# Altium PCB AT_START_F426 V1.0.pcbdoc (part 2 of 3)
Units mil, origin at the board's own origin, x right, y up, seen from the top; angles counter-clockwise.
Board outline 4602.43 x 3597.64 mil, 2 copper layers (Top Layer, Bottom Layer); 123 components, 105 nets, 472 pads, 880 vias.
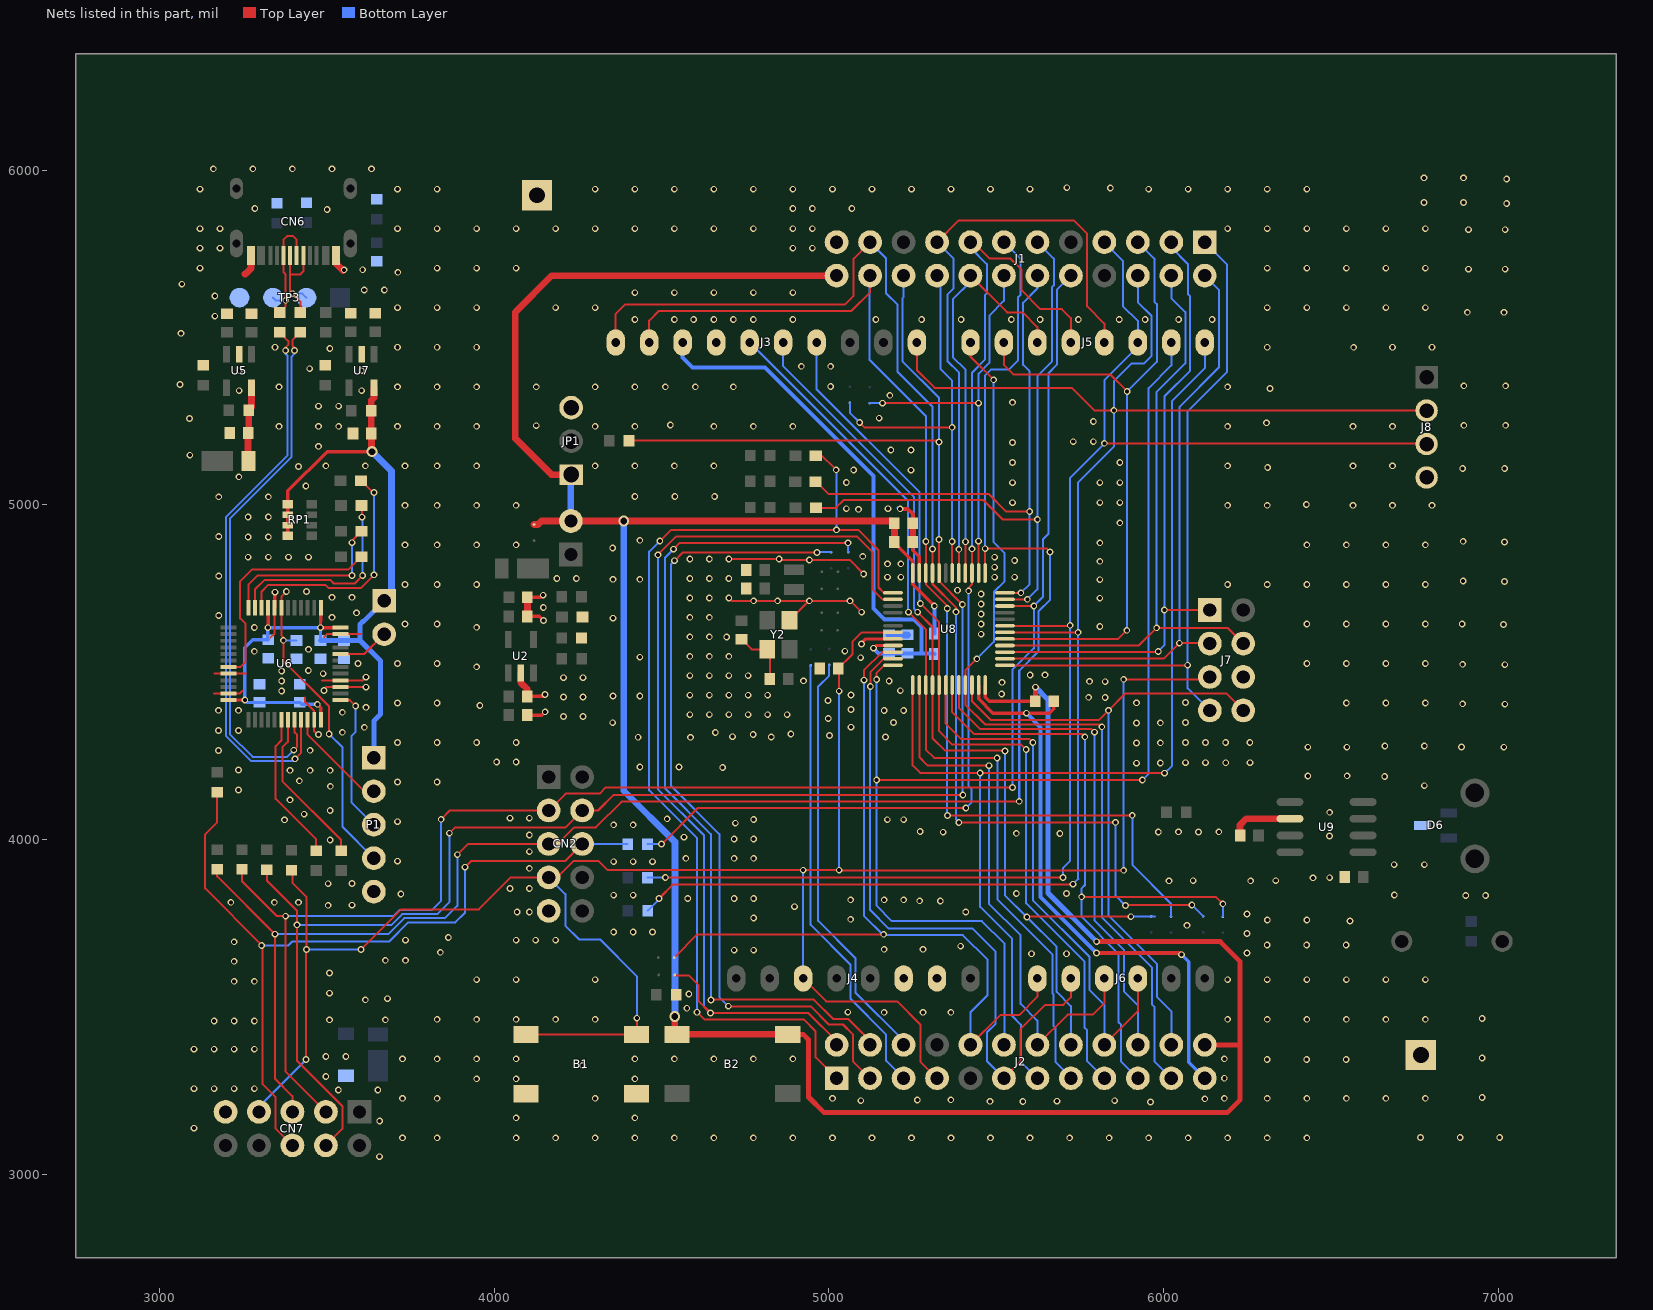
[diagram p2: the nets of this part, all layers, seen from the top]

## Via types
v1: diameter 20, hole 12, Top Layer to Bottom Layer, 848 vias
v2: diameter 32, hole 20, Top Layer to Bottom Layer, 21 vias
v3: diameter 19.68, hole 11.81, Top Layer to Bottom Layer, 11 vias

## Nets (pads, with @x,y where several pads share a name; then routed paths per layer and width w, separated by ;. In a path a pad name is that pad's centre, name@x,y a point inside that pad or via, vN(x,y) a via of type N, cw(c..) or ccw(c..) an arc to the next point about the centre after c; other vN are vias at no path point) (continued)
GND: B1.3 B1.4 C1.1 C2.1 C3.1 C4.1 C5.1 C6.1 C7.1 C8.1 C9.1 C10.1 C11.1 C12.1 C13.1 C14.1 C15.1 C16.1 C17.1 C18.1 C19.1 C20.1 C21.1 C22.1 C23.2 C24.2 C25.2 C26.2 C27.1 C28.1 C29.1 CN2.9 CN6.A1B12 CN6.B1A12 CN7.9 D4.2 D6.3 J1.23 J2.23 J3.7 J4.6 J4.7 J7.6 J8.4 JP1.3 LED1.2 P1.5 R2.2 R20.2 R34.2 R35.2 R36.2 R49.2 R51.2 T1.1 T2.1 TP3.4 U2.2 U5.2 U6.8 U6.20 U6.23 U6.35 U6.39 U6.40 U6.47 U7.2 U8.8 U8.23 U8.47 U9.2 Y2.2 Y2.4 | length 4746.7
  Top Layer w6: 3162.33,4436.4 U6.23@3206.5,4436.4 3240.42,4436.4 3248.06,4444.03 ; 3163.9,4495.45 U6.20@3206.5,4495.45 3258.71,4495.45 ; 3331.58,4602.93 3344.29,4615.64 U6.8@3344.29,4692.3 ; 3434.88,4424.47 3434.88,4411.58 3462.4,4384.06 U6.35@3462.4,4357.66 3462.4,4322.92 v1@3475.43,4309.89 ; 3485.27,4475.77 U6.40@3541.14,4475.77 3607.85,4475.77 v1(3617.17,4485.09) ; 3491.7,4605.07 3500.19,4613.56 U6.47@3541.14,4613.56 3602.28,4613.56 ; 3497.54,4456.08 U6.39@3541.14,4456.08 3616.19,4456.08 v1(3617.17,4455.09) ; v1(4701,4721.84) 4709.8,4713.04 v1(4775.43,4713.04) v1(4847.13,4713.04) v1@4940.65,4713.04 ; v1(4701,4838.06) v1(4851.5,4838.06) 4854.13,4835.43 v1(4941.58,4835.43) 5061.84,4835.43 v1(5103.97,4793.3) ; C3.1@4739.22,4598.2 4768.97,4568.45 Y2.4@4815.76,4568.45 4823.66,4560.55 C4.1@4823.66,4479.76 ; Y2.2@4882.69,4655.07 v1@4940.65,4713.04 ; v1(5097.9,4679.2) 5071.75,4705.35 5071.75,4705.77 5064.48,4713.04 v1@4940.65,4713.04
  Top Layer w10: U6.8@3344.29,4692.3 3344.29,4738.21 v1(3345.17,4739.09) ; C23.2@4098.78,4371.76 4142.56,4371.76 v1(4152.3,4381.5) ; C24.2@4098.78,4427.76 4146.36,4427.76 v1(4151.94,4433.34) ; C25.2@4099.06,4666.93 4134.75,4666.93 v1(4147.32,4654.36) ; C26.2@4099.39,4724.02 4140.1,4724.02 v1(4146.27,4730.19) ; v1(5097.28,4583.96) 5097.28,4585.83 5110.84,4599.38 U8.8@5191.5,4599.38 ; C6.1@5251.16,4888.52 5251.16,4864.67 5270.19,4845.64 U8.47@5270.2,4796.18 ; U8.23@5447.4,4461.58 5447.4,4420.03 5490.02,4377.42 v3(5590.06,4377.42) 5658.75,4377.42 5672.36,4391.03 C7.1@5672.36,4413.06
  Top Layer w12: v1(5213.06,4988.18) 5235.07,4988.18 5251.1,4972.15 C5.1@5251.1,4945.1 ; v1(5799.71,3661.28) 6048.68,3661.28 v1(6053.9,3656.06)
  Top Layer w20: 3255.14,5689.5 3256.72,5689.5 3273.37,5706.16 CN6.B1A12@3273.37,5744.79 ; CN6.A1B12@3527.17,5744.79 3527.17,5721.22 v1@3548.43,5699.96 ; U2.2@4079.24,4497.73 4079.24,4469.74 4098.78,4450.2 C24.2@4098.78,4427.76 ; C25.2@4099.06,4666.93 4099.39,4667.27 C26.2@4099.39,4724.02 ; C6.1@5251.1,4888.58 C5.1@5251.1,4945.1 ; C13.1@6228.62,4012.42 6228.13,4012.91 6228.13,4043.64 6246.64,4062.15 U9.2@6377.82,4062.15
  Bottom Layer w10: v1@5206.51,4991.67 5210.01,4988.18 v1(5213.06,4988.18) ; v1(6053.9,3656.06) 6075.22,3634.74 6075.22,3334.63 J2.23@6123.18,3286.67
  Bottom Layer w12: v3(5590.06,4377.42) 5632.24,4335.25 5632.24,3828.75 v1(5799.71,3661.28)
  Bottom Layer w20: C29.1@5179.22,4611.32 C28.1@5235.22,4611.32
  other v1: 3657.45,3052.34 3726.36,3108.67 3829.52,3108.67 4065.74,3108.67 4183.85,3108.67 4301.96,3108.67 4420.07,3108.67 4538.18,3108.67 4656.29,3108.67 4774.41,3108.67 4892.52,3108.67 5010.63,3108.67 5128.74,3108.67 5246.85,3108.67 5364.96,3108.67 5483.07,3108.67 5601.18,3108.67 5719.29,3108.67 5837.4,3108.67 5955.51,3108.67 6073.62,3108.67 6191.73,3108.67 6309.84,3108.67 6427.95,3108.67 6767.93,3109.56 6886.04,3109.56 7004.15,3109.56 3103.33,3137.54 3657.72,3158.99 4065.74,3168.67 4420.07,3168.67 5961.14,3215.99 5579.37,3217.28 5481.31,3217.99 5681.64,3218.34 5095.49,3219.92 5853.81,3219.98 5264.26,3221.51 5364.25,3222.21 6123.22,3225.22 3726.36,3226.78 3829.52,3226.78 4301.96,3226.78 5010.63,3226.78 6181.73,3226.78 6309.84,3226.78 6427.95,3226.78 6546.06,3226.78 6664.17,3226.78 6782.28,3226.78 6952.19,3229.35 3534.45,3251.78 3652.56,3251.78 3103.33,3255.65 3163.33,3255.65 3223.33,3255.65 3283.33,3255.65 3947.63,3284.89 4065.74,3284.89 4420.07,3284.89 6181.73,3286.78 3496.87,3291.89 4264.59,3324.78 6309.55,3342.82 6427.66,3342.82 6545.77,3342.82 3726.36,3344.89 3829.52,3344.89 3947.63,3344.89 4065.74,3344.89 4420.07,3344.89 4538.18,3344.89 4656.29,3344.89 4774.41,3344.89 4892.52,3344.89 6181.73,3344.89 6952.19,3347.46 3496.87,3351.89 3556.87,3351.89 3103.33,3373.76 3163.33,3373.76 3223.33,3373.76 3283.33,3373.76 3163.33,3458.06 3223.33,3458.06 3283.33,3458.06 3508.04,3461.43 3674.89,3461.11 3829.52,3463 3947.63,3463 4065.74,3463 4183.85,3463 4301.96,3463 6191.73,3463 6309.84,3463 6427.95,3463 6546.06,3463 6664.17,3463 6782.28,3463 6952.19,3465.57 5056.51,3484.22 5165.22,3483.75 5281.44,3483.75 5364.55,3483.75 4575.57,3495.93 3614.89,3521.11 3681.46,3524.63 4581.77,3538.69 3508.04,3541.09 3223.33,3576.17 3283.33,3576.17 3947.63,3581.11 4065.74,3581.11 4301.96,3581.11 6191.73,3581.11 6309.84,3581.11 6427.95,3581.11 6546.06,3581.11 6664.17,3581.11 6782.28,3581.11 3508.04,3601.09 3223.33,3636.17 3674.89,3639.22 3734.89,3639.22 5605.22,3658.76 5710.22,3658.76 6249.36,3661.11 3839.36,3663.01 4717.11,3669.51 4775.22,3669.51 5165.22,3672.06 5281.44,3672.06 5393.67,3681.44 6309.55,3685.15 6427.66,3685.15 6545.77,3685.15 3223.33,3694.28 3734.89,3699.22 4065.74,3699.22 4123.85,3699.22 4183.85,3699.22 3863.04,3707.11 6249.36,3719.22 4357.11,3723.76 4415.22,3723.76 4473.33,3723.76 6070.22,3743.76 6556.88,3756.69 6310.11,3759.86 6428.22,3759.86 5065.07,3761.65 4775.22,3765.65 6249.36,3777.33 4068.69,3783.29 4105.22,3783.76 5409,3783.76 4897.24,3799.51 3503.85,3803.27 3575.22,3803.76 3213.33,3812.39 3343.33,3812.39 3415.2,3812.39 5332.98,3816.24 5271.36,3816.71 5065.07,3819.76 5165.22,3819.76 5223.33,3819.76 4578.37,3823.76 4717.11,3823.76 4775.22,3823.76 6902.93,3832.86 6962.51,3832.86 4357.11,3833.76 4415.22,3833.76 6689.41,3834.4 3721.15,3837.31 5560.22,3838.76 5710.22,3838.76 4047.11,3853.76 4105.22,3853.76 3503.85,3868 3575.22,3868.5 6016.47,3876.76 6088.67,3877.28 6260.42,3876.76 6335.21,3877.28 6446.61,3885.53 6496.13,3886.04 4105.22,3913.76 6688.85,3924.81 6779.11,3924.89 4357.11,3933.76 4415.22,3933.76 4473.33,3933.76 3711.41,3935.44 4572.83,3943.72 4717.11,3943.72 4775.22,3943.72 4105.22,3963.76 3510.16,3998.69 4717.11,4001.83 4775.22,4001.83 4566.97,4006.99 6495.74,4010.6 4105.22,4013.76 5689.92,4018.27 5560.22,4018.76 5341.53,4022.14 5984.54,4022.7 6044.79,4023.14 6104.71,4022.7 6164.96,4023.14 5272.76,4023.86 4357.11,4043.76 4415.22,4043.76 4720.63,4048.92 3711.41,4053.55 3373.58,4058.69 5174.85,4059.24 5223.33,4059.24 4775.22,4059.94 4516.72,4062.02 4047.11,4063.76 4105.22,4063.76 3432.34,4075.89 6496.25,4081.26 3510.16,4086.68 3390.16,4118.69 3236.14,4147.95 3510.32,4158.87 6779.11,4161.11 3711.41,4171.66 3829.52,4171.66 3418.07,4175.29 6660.87,4188.37 6431.04,4189.72 6548.44,4190.43 3390.16,4206.68 3450.16,4206.68 3510.16,4206.68 3236.14,4207.95 4682.82,4215.47 4435.22,4216.99 4552.41,4216.64 5919.46,4228.25 5990.22,4228.76 6185.84,4229.43 6065.4,4229.68 6125.4,4229.68 6258.24,4229.61 4007.63,4231.66 4065.74,4231.66 3176.14,4266.06 3450.16,4266.68 6431.04,4275.85 6547.64,4276.05 7016.59,4275.92 6890.48,4276.69 6661,4279.22 6779.11,4279.22 5919.46,4288.25 5990.22,4288.76 3711.41,4289.77 3829.52,4289.77 3947.63,4289.77 4065.74,4289.77 6065.4,4289.68 6125.4,4289.68 6185.4,4289.68 6257.81,4289.87 4586.54,4305.22 4430.3,4305.63 4827.89,4306.1 5169.44,4306.08 4712.08,4307.16 5002.12,4310.64 3475.22,4313.76 4773.88,4314.02 4886.41,4315.07 3546.49,4320.17 4660.83,4320 3176.14,4326.06 3236.14,4326.06 3612.17,4335.09 5066.03,4335.71 5919.46,4348.25 4354.05,4349.25 5990.22,4348.76 5193.25,4349.71 6065.4,4349.68 4998.2,4361.72 4207.11,4367.54 4265.22,4367.54 4584.78,4373.18 4642.89,4373.18 4701,4373.18 4759.11,4373.18 4817.22,4373.18 4875.33,4373.18 3546.49,4380.17 3176.14,4386.06 3236.14,4386.06 5165.22,4385.65 5223.33,4385.65 5066.22,4388.31 3617.17,4395.09 3957.17,4400.54 6893.65,4405.35 7019.75,4404.58 3711.41,4407.88 3829.52,4407.88 5919.46,4408.25 6546.06,4407.88 6664.17,4407.88 6782.28,4407.88 6065.4,4409.68 4997.68,4415.49 5825.38,4424.36 5776.15,4424.77 4207.11,4425.65 4265.22,4425.65 4355.22,4428.88 4435.22,4428.88 4584.78,4431.29 4642.89,4431.29 4701,4431.29 4759.11,4431.29 4817.22,4431.29 5066.22,4431.98 5516.43,4435.12 3365.22,4443.76 3491.33,4445.2 5213.71,4444.7 5517.12,4469.85 5825.38,4471.55 5778.96,4472.66 3365.22,4473.76 4924.52,4473.99 5180.22,4473.76 4207.11,4483.76 4265.22,4483.76 4584.78,4489.4 4642.89,4489.4 4701,4489.4 4759.11,4489.4 5601.45,4491.86 5645.81,4492.2 3489.18,4495.52 3365.22,4503.76 3444.75,4505.24 3947.63,4515.99 6893.65,4523.46 7019.75,4522.69 3593.3,4525.99 3711.41,4525.99 3829.52,4525.99 6427.95,4525.99 6546.06,4525.99 6664.17,4525.99 6782.28,4525.99 5095.23,4543.42 4435.22,4545.1 4584.78,4547.51 4642.89,4547.51 4701,4547.51 3283.23,4562.14 5047.86,4563.02 3445.42,4568.23 4694.67,4605.39 4584.78,4605.62 4642.89,4605.62 5455.22,4613.76 3283.23,4633.73 3947.63,4634.1 5809.53,4636.37 7015.72,4642.33 3733.37,4644.1 3829.52,4644.1 5455.22,4643.76 6427.95,4644.1 6546.06,4644.1 6664.17,4644.1 6782.28,4644.1 6892.13,4644.07 4355.22,4661.32 3515.22,4663.76 4584.78,4663.73 4642.89,4663.73 3177.11,4669.43 5455.22,4673.76 3588.51,4677.52 4146.71,4693.5 5455.22,4703.76 4941.68,4713.04 5063.02,4713.04 5809.53,4721.37 4584.78,4721.84 4642.89,4721.84 3515.22,4723.76 3575.22,4723.76 5455.22,4733.76 3439.17,4741.09 5384.62,4744.83 3733.37,4762.21 3829.52,4762.21 3947.63,4762.21 6191.73,4762.21 6309.84,4762.21 6427.95,4762.21 6546.06,4762.21 6664.17,4762.21 6782.28,4762.21 7018.88,4771 6895.29,4772.74 5809.53,4776.37 4355.22,4777.54 4435.22,4777.54 4187.4,4780.13 4245.51,4780.13 4584.78,4779.95 4642.89,4779.95 4701,4779.95 5175.22,4783.76 5215.22,4783.76 5495.22,4783.76 5555.22,4783.76 3177.11,4787.54 5495.22,4813.76 5175.22,4823.76 5215.22,4823.76 5809.53,4831.37 5555.22,4833.76 4584.78,4838.06 4642.89,4838.06 3265.22,4843.76 3325.22,4843.76 3385.22,4843.76 3445.22,4843.76 5495.22,4843.76 5101.25,4846.11 4354.05,4871.25 3733.37,4880.32 3829.52,4880.32 3947.63,4880.32 4065.74,4880.32 6427.95,4880.32 6546.06,4880.32 6664.17,4880.32 6782.28,4880.32 5809.53,4886.37 7018.88,4889.11 6895.29,4890.85 4435.22,4893.76 3265.22,4903.76 3325.22,4903.76 3177.11,4905.65 5869.53,4946.37 3265.22,4963.76 3325.22,4963.76 5088.41,4986.67 5176.57,4988.46 5052.38,4988.55 3733.37,4998.44 3829.52,4998.44 3947.63,4998.44 4065.74,4998.44 6191.73,4998.44 6309.84,4998.44 6566.06,4998.44 6684.17,4998.44 6802.28,4998.44 6426.54,5001.01 5548.62,5006.37 5809.53,5006.37 5869.53,5006.37 3177.11,5023.76 3325.22,5023.76 3437.15,5056.55 5548.62,5066.37 5809.53,5066.37 5869.53,5066.37 5052.15,5066.66 3237.11,5083.76 5074.33,5104.19 5245.22,5103.76 6893.87,5108.84 7019.2,5108.84 6310.89,5111.62 3415.19,5114.66 3497.15,5116.55 3615.26,5116.55 3733.37,5116.55 3829.52,5116.55 3947.63,5116.55 4301.96,5116.55 4420.07,5116.55 4538.18,5116.55 4656.29,5116.55 6191.73,5116.55 6566.06,5116.55 6684.17,5116.55 5548.62,5126.37 5869.53,5126.37 3090.78,5148.43 5185.22,5163.76 5245.22,5163.76 3475.19,5174.66 5548.62,5186.37 5730.22,5188.76 5790.22,5188.76 3357.08,5234.66 3475.19,5234.66 3535.19,5234.66 3711.41,5234.66 3829.52,5234.66 3947.63,5234.66 4301.96,5234.66 4420.07,5234.66 4656.29,5234.66 4774.41,5234.66 4892.52,5234.66 6191.73,5234.66 6566.06,5234.66 6684.17,5234.66 4125.74,5236.55 6897.04,5237.51 7022.37,5237.51 4526.22,5238.53 6307.43,5244.86 5790.22,5248.76 3089.6,5257.97 5150.22,5258.76 3475.19,5294.66 3535.19,5294.66 5548.62,5306.37 5182.09,5327.2 3238.17,5340.97 3604.17,5340.97 6318.05,5347.49 3357.08,5352.77 3711.41,5352.77 3829.52,5352.77 3947.63,5352.77 4125.74,5352.77 4301.96,5352.77 4420.07,5352.77 4511.55,5352.77 4601.22,5352.77 4714.41,5352.77 6191.73,5352.77 5005.22,5353.76 6897.04,5355.62 7022.37,5355.62 3061.49,5359.54 3238.17,5400.97 3604.17,5400.97 3448.88,5407.08 4917.72,5413.76 5005.22,5413.76 3508.88,5467.08 3345.29,5470.88 3711.41,5470.88 3829.52,5470.88 3947.63,5470.88 6309.84,5470.88 6567.93,5470.64 6684.17,5470.88 6802.28,5470.88 3064.25,5512.4 4420.07,5553.78 4538.18,5553.78 4596.29,5553.78 4656.29,5553.78 4714.41,5553.78 4774.41,5553.78 4892.52,5553.78 5140.22,5553.76 5277.11,5553.76 5395.22,5553.76 5545.22,5553.76 5631.44,5553.76 5745.22,5553.76 5867.66,5553.76 5945.22,5553.76 6045.22,5553.76 6145.22,5553.76 3165.22,5563.76 6907.79,5575.35 7017.46,5575.35 3711.41,5588.99 3829.52,5588.99 3947.63,5588.99 4183.85,5588.99 4301.96,5588.99 6309.84,5588.99 6427.95,5588.99 6546.06,5588.99 6664.17,5588.99 6782.28,5588.99 3165.22,5623.76 4420.07,5634.09 4538.18,5634.09 4656.29,5634.09 4774.41,5634.09 4892.52,5634.09 3611.85,5642.2 3671.85,5642.2 3066.69,5659.17 3712.35,5694.67 3551.85,5702.2 3606.92,5702.43 6910.96,5704.01 7020.63,5704.01 3120.86,5707.1 3829.52,5707.1 3947.63,5707.1 4065.74,5707.1 6309.84,5707.1 6427.95,5707.1 6546.06,5707.1 6664.17,5707.1 6782.28,5707.1 3120.86,5767.1 3180.86,5767.1 4892.52,5767.1 4950.63,5767.1 6910.96,5822.12 7020.63,5822.12 3120.86,5825.21 3180.86,5825.21 3711.41,5825.21 3829.52,5825.21 3947.63,5825.21 4065.74,5825.21 4183.85,5825.21 4301.96,5825.21 4420.07,5825.21 4538.18,5825.21 4656.29,5825.21 4774.41,5825.21 4892.52,5825.21 4950.63,5825.21 6191.73,5825.21 6309.84,5825.21 6427.95,5825.21 6546.06,5825.21 6664.17,5825.21 6782.28,5825.21 3501.15,5882.6 3284.86,5885.42 4892.52,5885.21 4950.63,5885.21 5068.74,5885.21 7025.12,5900.25 6778.34,5903.42 6896.45,5903.42 3120.86,5943.32 3711.41,5943.32 3829.52,5943.32 4301.96,5943.32 4420.07,5943.32 4538.18,5943.32 4656.29,5943.32 4774.41,5943.32 4892.52,5943.32 5010.63,5943.32 5128.74,5943.32 5246.85,5943.32 5364.96,5943.32 5483.07,5943.32 5601.18,5943.32 5955.51,5943.32 6073.62,5943.32 6191.73,5943.32 6309.84,5943.32 6427.95,5943.32 5841.09,5946.48 5710.84,5947.54 7025.12,5973.75 6778.34,5976.92 6896.45,5976.92 3160.89,6003.76 3279,6003.76 3397.11,6003.76 3515.22,6003.76 3633.33,6003.76
  other v3: 4420.45,5024.82 4539.71,5024.82 4658.61,5024.82
LD1: LD1.2 U6.10 | length 713.3
  Top Layer w6: U6.10@3304.92,4692.3 3304.92,4740.84 3325.17,4761.09 3495.17,4761.09 3505.17,4751.09 3601.17,4751.09 v1(3641.17,4791.09) ; LD1.2@3602.35,5072.3 3637.56,5037.09 v1(3641.17,5037.09)
  Bottom Layer w6: v1(3641.17,4791.09) v1(3641.17,5037.09)
LD2: LD2.2 U6.11 | length 613.2
  Top Layer w6: U6.11@3285.24,4692.3 3285.24,4747.16 3313.17,4775.09 3511.17,4775.09 3521.17,4765.09 3583.17,4765.09 v1(3607.17,4789.09) ; LD2.2@3603.31,4998.21 3605.17,4996.34 v1(3605.17,4963.09)
  Bottom Layer w6: v1(3605.17,4963.09) 3607.17,4961.09 v1(3607.17,4789.09)
LD3: LD3.2 U6.12 | length 534.1
  Top Layer w6: U6.12@3265.55,4692.3 3265.55,4761.47 3293.17,4789.09 v1(3575.17,4789.09) ; v1(3575.17,4887.09) 3575.17,4893.13 LD3.2@3603.35,4921.3
  Bottom Layer w6: v1(3575.17,4789.09) v1(3575.17,4887.09)
LD4: LD4.2 U6.19 | length 696.8
  Top Layer w6: U6.19@3206.5,4515.14 3241.22,4515.14 3257.17,4531.09 3257.17,4645.09 3241.17,4661.09 3241.17,4771.09 3277.17,4807.09 3565.1,4807.09 LD4.2@3603.31,4845.3
M-ATLK_RX: R48.1 U6.31 | length 470.7
  Top Layer w6: U6.31@3383.66,4357.66 3383.66,4291.62 3367.17,4275.13 3367.17,4174.14 3542.35,3998.96 R48.1@3542.35,3966.3
M-ATLK_TX: R47.1 U6.30 | length 448.5
  Top Layer w6: U6.30@3363.98,4357.66 3363.98,4295.93 3347.17,4279.13 3347.17,4121.48 3468.35,4000.3 R47.1@3468.35,3966.3
M-BOOT0: J9.2 U6.44 | length 154.6
  Top Layer w6: U6.44@3541.14,4554.51 3612.55,4554.51 J9.2@3671.35,4613.3
M-NRST: C22.2 P1.4 U6.7 | length 957
  Top Layer w6: v1(3379.17,4741.09) 3363.98,4725.9 U6.7@3363.98,4692.3 3363.98,4610.29 3369.98,4604.29 3369.98,4534.64 3507.17,4397.45 v1(3507.17,4315.09)
  Bottom Layer w6: v1(3369.98,4595.35) 3370.67,4594.65 C22.2@3409.17,4594.65 ; v1(3507.17,4315.09) 3547.17,4275.09 3547.17,4037.48 P1.4@3640.35,3944.3
M-SWCLK: P1.3 U6.37 | length 440.3
  Top Layer w6: U6.37@3541.14,4416.71 3568.56,4416.71 v1(3586.17,4399.09)
  Bottom Layer w6: v1(3586.17,4399.09) 3585.22,4398.14 3585.22,4321.14 3573.17,4309.09 3573.17,4111.48 P1.3@3640.35,4044.3
M-SWDIO: P1.2 U6.34 | length 311.8
  Top Layer w6: U6.34@3442.72,4357.66 3442.72,4313.55 3611.97,4144.3 P1.2@3640.35,4144.3
M-USB_DM: R38.2 U6.32 | length 1617.9
  Top Layer w6: v1(3401.17,4267.09) 3411.03,4276.95 3411.03,4312.97 3403.35,4320.65 U6.32@3403.35,4357.66 ; v1(3403.17,5461.09) 3403.17,5470.15 3397.17,5476.15 3397.17,5491.43 R38.2@3421.17,5515.43
  Bottom Layer w6: v1(3401.17,4267.09) 3381.17,4247.09 3278.14,4247.09 3210.35,4314.89 3210.35,4958.27 3395.17,5143.09 3395.17,5443.09 3403.17,5451.09 v1(3403.17,5461.09)
M-USB_DP: R37.2 U6.33 | length 1662.9
  Top Layer w6: R37.2@3359.17,5515.43 3385.17,5489.43 3385.17,5478.82 3377.17,5470.82 v1(3377.17,5461.09) ; v1(3405.17,4241.09) 3423.03,4258.95 U6.33@3423.03,4357.66
  Bottom Layer w6: v1(3377.17,5461.09) 3377.17,5450.69 3383.17,5444.69 3383.17,5148.06 3198.35,4963.24 3198.35,4309.92 3273.17,4235.09 3399.17,4235.09 v1(3405.17,4241.09)
NRST/PF2: B1.1 B1.2 C27.2 CN2.7 CN7.7 J2.7 J4.3 J7.5 R46.2 U8.7 | length 6884.2
  Top Layer w6: R46.2@3394.35,3906.3 3397.35,3903.3 3397.35,3870.43 3439.17,3828.61 v1(3439.17,3671.47) 3437.99,3670.29 v1(3437.99,3342.83) ; v1(3602.01,3671.27) 3722.3,3791.56 3954.53,3791.56 4049.77,3886.8 CN2.7@4162.92,3886.8 4188.38,3886.8 4238.02,3936.44 4311.3,3936.44 4339.18,3908.57 v1@4923.29,3908.57 ; B1.1@4095.26,3417.5 B1.2@4425.96,3417.5 4426.46,3418 v1(4426.46,3466.42) ; J4.3@4923.17,3585.09 4991.78,3516.49 5204.03,3516.49 5273.19,3447.33 5273.19,3336.65 J2.7@5323.18,3286.67 ; v1(4923.17,3908.45) v1@4923.29,3908.57 ; v1(5030.81,4443.33) 5030.81,4508.79 C27.2@5028.3,4511.3 5069.91,4552.91 5069.91,4591.33 5097.64,4619.07 U8.7@5191.5,4619.08 ; v3(5880.93,3907.76) 5031.67,3907.76 v1(5030.86,3908.57) v1@4923.29,3908.57 ; v3@5880.93,4478.76 6131.27,4478.76 J7.5@6138.17,4485.67
  Bottom Layer w6: CN7.7@3297.35,3186.3 3297.35,3202.19 v1(3437.99,3342.83) ; v1(3439.17,3671.47) 3601.81,3671.47 v1(3602.01,3671.27) ; CN2.7@4162.92,3886.8 4212.66,3837.07 4212.66,3742.48 4253.38,3701.75 4316.19,3701.75 4426.46,3591.48 v1(4426.46,3466.42) ; J4.3@4923.17,3585.09 v1(4923.17,3908.45) ; v1@5030.81,3908.62 v1(5030.81,4443.33) ; v3(5880.93,3907.76) v3(5880.93,4478.74)
PA0: J2.10 J6.1 R18.1 U8.10 | length 2512.6
  Top Layer w6: R18.1@4537.92,3647.36 4607.18,3716.62 v1(5163.66,3716.62) ; v1(5104.78,4475.97) 5104.78,4505.33 5159.43,4559.97 U8.10@5191.5,4559.98 ; J2.10@5423.18,3386.67 5512.16,3475.65 5568.35,3475.65 5623.17,3530.47 J6.1@5623.17,3585.09
  Bottom Layer w6: v1(5104.78,4475.97) 5104.78,3772.8 5163.3,3714.29 v1@5163.66,3714.65 ; v1(5163.66,3716.62) v1@5163.66,3714.65 ; J2.10@5423.18,3386.67 5423.18,3484.02 5474.67,3535.51 5474.67,3640.46 5400.47,3714.65 v1@5163.66,3714.65
PA1: J2.11 J6.2 U8.11 | length 2045.1
  Top Layer w6: v1(5123.78,4457.12) 5123.78,4500.33 5163.73,4540.27 U8.11@5191.5,4540.28 ; J2.11@5523.18,3286.67 5572.48,3335.97 5572.48,3432.67 5646,3506.19 5700.63,3506.19 5723.17,3528.74 J6.2@5723.17,3585.09
  Bottom Layer w6: v1(5123.78,4457.12) 5122.89,4456.22 5122.89,3789.81 5177.94,3734.75 5427.81,3734.75 5498.26,3664.3 5498.26,3449.58 5472.46,3423.78 5472.46,3337.38 J2.11@5523.18,3286.67
PA2: J2.12 J5.2 U8.12 | length 3623.1
  Top Layer w6: v1@5142.51,4177.71 v1(5936.39,4177.71) ; v1(5142.78,4478.11) 5142.78,4497.75 5165.6,4520.57 U8.12@5191.5,4520.58
  Bottom Layer w6: v1(5142.78,4478.11) v1(5142.78,4177.91) 5142.78,3802.2 5188.56,3756.43 5457.3,3756.43 5525.18,3688.55 5525.18,3388.67 J2.12@5523.18,3386.67 ; v1(5936.39,4177.71) 5955.25,4196.57 5955.25,5348.82 6023.17,5416.74 J5.2@6023.17,5485.09
PA3: J2.13 J5.1 U8.13 | length 3322.2
  Top Layer w6: U8.13@5250.5,4461.58 5250.49,4221.79 5273.04,4199.24 5452.43,4199.24 5452.22,4199.03 v1(5452.22,4198.76) 5452.7,4199.24 6001.98,4199.24 v1(6002.82,4198.4)
  Bottom Layer w6: v1(5452.22,4198.76) 5452.22,3798.76 5547.72,3703.27 5547.72,3472.86 5573.4,3447.18 5573.4,3336.45 J2.13@5623.18,3286.67 ; v1(6002.82,4198.4) 6025.39,4220.97 6025.39,5310.69 6123.17,5408.48 J5.1@6123.17,5485.09
PA4: J2.14 J6.3 U8.14 | length 1653.3
  Top Layer w6: U8.14@5270.2,4461.58 5270.19,4246.54 5295.98,4220.75 v1(5478.22,4220.76) ; J2.14@5623.18,3386.67 5713.17,3476.66 5788.53,3476.66 5823.17,3511.31 J6.3@5823.17,3585.09
  Bottom Layer w6: v1(5478.22,4220.76) 5478.22,3808.76 5572.93,3714.05 5572.93,3509.26 5623.18,3459.01 J2.14@5623.18,3386.67
PA5: J2.15 J3.6 U8.15 | length 2706.5
  Top Layer w6: v1(5238.23,4679.48) 5289.89,4627.83 U8.15@5289.9,4461.58 5289.89,4268.31 5314.35,4243.84 v1(5502.93,4243.84)
  Bottom Layer w6: J3.6@4763.17,5485.09 5236.78,5011.48 5236.78,4680.93 v1(5238.23,4679.48) ; v1(5502.93,4243.84) 5503.22,4243.55 5503.22,3821.05 5668.86,3655.41 5668.86,3539.89 5671.37,3537.38 5671.37,3442.78 5677.68,3436.47 5677.68,3335.17 5723.18,3289.67 J2.15@5723.18,3286.67
PA6: J2.16 J3.5 R25.1 U8.16 | length 2941.9
  Top Layer w6: v1(5265.23,4679.36) 5309.59,4635 U8.16@5309.6,4461.58 5309.59,4303.01 5347.18,4265.42 5525.33,4265.42 v1(5526.07,4264.68) ; v1(5591.51,3768.52) 5592.68,3769.7 v1(5902.24,3769.7)
  Bottom Layer w6: J3.5@4863.17,5485.09 4863.17,5414.65 5254.23,5023.59 5254.23,4690.35 v1(5265.23,4679.36) ; v1(5526.07,4264.68) 5526.07,3833.96 v1(5591.51,3768.52) 5680.86,3679.16 5680.86,3544.86 5723.18,3502.54 J2.16@5723.18,3386.67 ; v1(5902.24,3769.7) 5973.69,3769.7 5973.86,3769.52
PA7: J2.17 J3.4 U8.17 | length 2674.9
  Top Layer w6: v1(5273.23,4705.36) 5329.29,4649.3 U8.17@5329.3,4461.58 5329.29,4323.7 5369.3,4283.68 5574.69,4283.68 v1(5589.44,4268.93)
  Bottom Layer w6: J3.4@4963.17,5485.09 4963.17,5345.4 5270.96,5037.61 5270.96,4898.61 ; 5270.89,4898.54 5270.89,4707.7 v1(5273.23,4705.36) ; v1(5589.44,4268.93) 5589.44,3809.55 5764.24,3634.75 5764.24,3437.36 5771.68,3429.92 5771.68,3338.17 J2.17@5823.18,3286.67
PA8: J1.5 J5.7 U8.29 | length 2063.2
  Top Layer w6: J5.7@5523.17,5485.09 5523.17,5418.03 5551.16,5390.05 5840.01,5390.05 v1(5891.29,5338.76) ; U8.29@5526.1,4599.38 5864.5,4599.37 v1(5890.22,4625.09)
  Bottom Layer w6: v1(5890.22,4625.09) 5891.29,4626.17 v1(5891.29,5338.76) 5980.01,5427.48 5980.01,5599.55 5972.57,5606.99 5972.57,5735.36 J1.5@5923.16,5784.77
PA9/USART1_TX: J1.6 J3.1 J8.2 R16.1 U8.30 | length 5126.4
  Top Layer w6: v1(4492.4,3823.85) 4534.69,3866.14 5728.6,3866.14 v1(5729.22,3866.76) ; J3.1@5263.17,5485.09 5263.17,5402.81 5316.22,5349.76 5726.22,5349.76 5793.41,5282.58 v1(5851.49,5282.58) 5852.3,5281.76 J8.2@6785.9,5281.76 ; U8.30@5526.1,4619.08 5744.66,4619.07 v1(5744.9,4619.31)
  Bottom Layer w6: R16.1@4458.37,3787.38 v1@4488.48,3817.5 ; v1(5729.22,3866.76) 5744.9,3882.44 5744.9,3883.09 ; 5745.22,3882.76 5744.9,3883.09 ; J1.6@5923.16,5684.77 5923.16,5605.83 5964.71,5564.28 5964.71,5445.21 5941.14,5421.65 5903.75,5421.65 5851.49,5369.39 v1(5851.49,5282.58) 5851.49,5174.03 5744.9,5067.44 v1(5744.9,4619.31) 5744.9,3883.09
PA10/USART1_RX: J1.7 J5.3 J8.3 R15.1 U8.31 | length 4433.5
  Top Layer w6: v1(4511.42,3886.34) v1(5699.76,3886.34) ; U8.31@5526.1,4638.68 5719.94,4638.67 v1(5721.09,4639.83) ; v1(5822.95,5183.78) 6783.89,5183.78 J8.3@6785.9,5181.76
  Bottom Layer w6: R15.1@4458.01,3886.34 v1(4511.42,3886.34) ; v1(5699.76,3886.34) 5699.76,3915.53 5721.22,3936.99 5721.22,4639.7 v1(5721.09,4639.83) 5721.09,5080.64 5822.95,5182.5 v1(5822.95,5183.78) 5822.95,5372.69 5923.17,5472.91 J5.3@5923.17,5485.09 5923.17,5549.54 5878.73,5593.99 5878.73,5729.2 J1.7@5823.16,5784.77
PA13/SWDIO: CN2.3 CN7.3 J1.10 R44.2 U8.34 | length 5004.3
  Top Layer w6: R44.2@3246.55,3910.68 3246.55,3875.71 3351.17,3771.09 v1(3377.17,3771.09) 3377.17,3306.48 CN7.3@3497.35,3186.3 ; v1(3841.48,4060.41) 3867.88,4086.8 CN2.3@4162.92,4086.8 4213.54,4137.43 4315.42,4137.43 4333.64,4155.65 v1(5548.57,4155.65) ; U8.34@5526.1,4697.78 v1(5612.26,4697.77)
  Bottom Layer w6: v1(3377.17,3771.09) 3699.25,3771.09 3717.01,3788.85 3813.25,3788.85 3841.48,3817.08 v1(3841.48,4060.41) ; v1(5548.57,4155.65) 5548.57,4507.66 5612.26,4571.35 v1(5612.26,4697.77) 5639.85,4725.36 5639.83,4897.71 5656.22,4914.09 5656.22,5393.76 5681.41,5418.95 5681.41,5643.02 J1.10@5723.16,5684.77
PA14/SWCLK: CN2.5 CN7.5 J1.13 R41.2 U8.37 | length 5360.3
  Top Layer w6: R41.2@3172.55,3910.68 3172.55,3889.71 v1(3345.17,3717.09) 3345.17,3285.35 3397.35,3233.18 CN7.5@3397.35,3186.3 ; v1(3889.78,3954.65) 3921.92,3986.8 CN2.5@4162.92,3986.8 4189.47,3986.8 4238.99,4036.32 4303.82,4036.32 4380.73,4113.24 5567.75,4113.24 v1(5568.86,4114.32) ; U8.37@5467.1,4796.18 v1(5467.09,4869.09) 5651.02,4869.09 v1(5660.92,4859.19)
  Bottom Layer w6: v1(3345.17,3717.09) 3683.53,3717.09 3731.29,3764.85 3852.55,3764.85 3889.78,3802.08 v1(3889.78,3954.65) ; v1(5467.09,4869.09) 5467.09,5386.85 5485.2,5404.96 5538.57,5404.96 5565.69,5432.08 5565.69,5620.95 5572.9,5628.15 5572.9,5735.03 J1.13@5523.16,5784.77 ; v1(5568.86,4114.32) 5568.86,4504.56 5626.36,4562.06 5626.36,4681.65 5660.92,4716.21 v1(5660.92,4859.19)
PA15: J1.14 R29.1 U8.38 | length 1245.1
  Top Layer w6: v1(5160.17,5303.8) v1(5447.32,5303.8) ; U8.38@5447.4,4796.18 v1(5447.39,4891.42)
  Bottom Layer w6: R29.1@5122.11,5303.8 v1(5160.17,5303.8) ; v1(5447.39,4891.42) v1@5447.39,5303.8 ; v1@5447.39,5303.87 5447.39,5392.34 5479.39,5424.34 5479.39,5565.55 5523.16,5609.31 J1.14@5523.16,5684.77
PB0: J2.18 J6.4 U8.18 | length 1630.9
  Top Layer w6: U8.18@5349,4461.58 5348.99,4346.11 5395.33,4299.76 5599.66,4299.76 v1(5609.32,4290.11) ; J2.18@5823.18,3386.67 5923.17,3486.67 J6.4@5923.17,3585.09
  Bottom Layer w6: v1(5609.32,4290.11) 5609.32,3818.66 5779.01,3648.97 5779.01,3549.96 5823.18,3505.79 J2.18@5823.18,3386.67
PB1: J2.19 R27.1 U8.19 | length 2071.2
  Top Layer w6: U8.19@5368.6,4461.58 5368.59,4380.51 5433.33,4315.76 5755.65,4315.76 v1(5764.7,4306.71) ; v3(5755.1,3828.93) 6156.24,3828.93 v1(6177.25,3807.91)
  Bottom Layer w6: v1(5764.7,4306.71) 5765.22,4306.19 5765.22,3864.11 5755.1,3853.99 v3(5755.1,3828.93) 5755.1,3768.88 5865.22,3658.76 5865.22,3454.76 5873.22,3446.76 5873.22,3336.63 J2.19@5923.18,3286.67 ; R27.1@6177.27,3769.35 v1(6177.25,3807.91)
PB2: J2.20 U8.20 | length 1492
  Top Layer w6: U8.20@5388.3,4461.58 5388.29,4393.51 5452.04,4329.76 5784.77,4329.76 v1(5793.92,4320.61)
  Bottom Layer w6: v1(5793.92,4320.61) 5793.22,4319.91 5793.22,3758.76 5882.22,3669.76 5882.22,3545.4 5923.18,3504.44 J2.20@5923.18,3386.67
PB3/SWO: J1.15 J5.5 R14.1 U8.39 | length 3243.6
  Top Layer w6: v1(4500.11,3986.41) 4607.94,4094.24 v1(5409.21,4094.24) ; v1(5417.69,4743.29) 5417.69,4752.23 5427.69,4762.23 U8.39@5427.7,4796.18 v1(5427.69,4868.4) ; J1.15@5423.16,5784.77 5431.62,5784.77 5480.68,5735.71 5542.65,5735.71 5575.7,5702.66 5575.7,5640.69 5631.47,5584.92 5696.2,5584.92 5723.17,5557.94 J5.5@5723.17,5485.09
  Bottom Layer w6: R14.1@4457.98,3986.26 4499.95,3986.26 v1(4500.11,3986.41) ; v1(5409.21,4094.24) 5426.86,4111.89 5426.86,4150.37 5417.69,4159.54 v1(5417.69,4743.29) ; J1.15@5423.16,5784.77 5423.16,5768.22 5472.13,5719.25 5472.13,5631.6 5466.13,5625.6 5466.13,5433.7 5427.69,5395.26 v1(5427.69,4868.4)
PB4: J1.16 J5.6 U8.40 | length 1235.9
  Top Layer w6: U8.40@5408,4796.18 5408.4,4796.58 v1(5408.41,4889.74) ; J1.16@5423.16,5684.77 5532.84,5575.09 5578.9,5575.09 5623.17,5530.81 J5.6@5623.17,5485.09
  Bottom Layer w6: v1(5408.41,4889.74) 5408.41,5403.27 5370.32,5441.37 5370.32,5613.68 5423.16,5666.52 J1.16@5423.16,5684.77
PB5: J1.17 J5.4 U8.41 | length 1869.6
  Top Layer w6: J1.17@5323.16,5784.77 5388.32,5849.93 5731.62,5849.93 5771.9,5809.65 5771.9,5592.76 5823.17,5541.48 J5.4@5823.17,5485.09 ; U8.41@5388.3,4796.18 v1@5388.29,4867.25
  Bottom Layer w6: J1.17@5323.16,5784.77 5373.11,5734.81 5373.11,5646.94 5354.01,5627.84 5354.01,5429.8 5388.28,5395.53 v1(5388.28,4867.26)
PB6: J1.18 R28.1 U8.42 | length 1261
  Top Layer w6: v1(5091.91,5246.08) 5106.39,5231.6 v1(5368.58,5231.6) ; U8.42@5368.6,4796.18 v1@5368.59,4890.74
  Bottom Layer w6: R28.1@5062.86,5305.01 5062.86,5275.14 v1(5091.91,5246.08) ; J1.18@5323.16,5684.77 5333.85,5674.08 5333.85,5405.58 5368.58,5370.85 v1(5368.58,5231.6) v1(5368.58,4890.75)
PB8: J1.21 J3.10 R26.1 U8.45 | length 3818.9
  Top Layer w6: J3.10@4363.17,5485.09 4363.17,5570.52 4391.48,5598.83 5048.48,5598.83 5073.89,5624.23 5073.89,5735.5 J1.21@5123.16,5784.77 ; v1(5309.59,4868.31) U8.45@5309.6,4796.18 5309.59,4763.56 5379.69,4693.46 v1(5379.69,4680.5) ; v1(5388.55,4051.18) 5856.44,4051.18 v1(5856.55,4051.29) ; v1(5886.22,3802.76) 5888.08,3804.63 v1(6084.59,3804.63)
  Bottom Layer w6: J1.21@5123.16,5784.77 5170.79,5737.14 5170.79,5632.6 5205.5,5597.89 5205.5,5396.98 5309.59,5292.89 v1(5309.59,4868.31) ; v1(5379.69,4680.5) 5379.69,4060.04 v1(5388.55,4051.18) ; v1(5856.55,4051.29) 5856.55,3832.44 v1(5886.22,3802.76) ; v1(6084.59,3804.63) 6118.34,3770.88 R26.1@6118.34,3770.58
PB9: J1.22 J3.9 R24.1 U8.46 | length 3422.2
  Top Layer w6: J3.9@4463.17,5485.09 4463.17,5550.44 4491.97,5579.24 5067.54,5579.24 5123.16,5634.86 J1.22@5123.16,5684.77 ; v1(5289.89,4890.67) U8.46@5289.9,4796.18 5289.89,4762.12 5353.71,4698.3 v1(5353.71,4690.39) ; v1(5354.67,4072.02) v3(5906.53,4072.02)
  Bottom Layer w6: J1.22@5123.16,5684.77 5120.98,5682.59 5120.98,5434.27 5289.89,5265.36 v1(5289.89,4890.67) ; v1(5353.71,4690.39) 5353.71,4072.98 v1(5354.67,4072.02) ; v3(5906.53,4072.02) 5906.53,3924.46 6022.23,3808.75 R24.1@6022.23,3770.26
PB10: J2.21 J5.8 U8.21 | length 2744.1
  Top Layer w6: J5.8@5423.17,5485.09 5423.17,5442.67 v1(5492.35,5373.5) ; v1(5442.08,4539.79) 5407.99,4505.7 U8.21@5408,4461.58 5407.99,4402.81 5467.03,4343.76 5808.44,4343.76 v1(5815.6,4336.61)
  Bottom Layer w6: v1(5442.08,4539.79) 5493.11,4590.82 5493.11,4739.58 5525.22,4771.69 5525.22,4855.53 5492.35,4888.4 v1(5492.35,5373.5) ; v1(5815.6,4336.61) 5816.22,4335.98 5816.22,3766.76 5964.86,3618.12 5964.86,3507.76 5973.67,3498.94 5973.67,3336.17 J2.21@6023.18,3286.67
PB11: J2.22 J7.8 U8.22 | length 2012.9
  Top Layer w6: U8.22@5427.7,4461.58 5427.69,4413.06 5482.98,4357.76 5807.39,4357.76 v1(5835.71,4386.09) 5886.39,4436.76 6187.08,4436.76 J7.8@6238.17,4385.67
  Bottom Layer w6: v1(5835.71,4386.09) 5835.71,3772.27 5979.71,3628.27 5979.71,3530.29 6023.18,3486.82 J2.22@6023.18,3386.67
PB12: J1.1 J7.7 U8.25 | length 2048.8
  Top Layer w6: U8.25@5526.1,4520.58 6071.78,4520.57 v1(6072.18,4520.97)
  Bottom Layer w6: J1.1@6123.16,5784.77 6189.12,5718.8 6189.12,5396.79 6071.7,5279.37 6071.7,4521.44 v1(6072.18,4520.97) 6072.18,4451.67 J7.7@6138.17,4385.67
PB13: J1.2 J7.3 U8.26 | length 1796.3
  Top Layer w6: U8.26@5526.1,4540.28 6000.84,4540.27 v1(6047.3,4586.73) 6137.11,4586.73 J7.3@6138.17,4585.67
  Bottom Layer w6: v1(6047.3,4586.73) 6047.3,5292.1 6165.54,5410.34 6165.54,5642.39 J1.2@6123.16,5684.77
PB14: J1.3 J7.1 U8.27 | length 1880.4
  Top Layer w6: U8.27@5526.1,4559.98 5982.09,4559.97 v1(5984.15,4562.04) ; v1(6002.2,4686.08) 6137.77,4686.08 J7.1@6138.17,4685.67
  Bottom Layer w6: v1(5984.15,4562.04) 6002.7,4580.58 6002.7,5323.7 6079.22,5400.23 6079.22,5623.52 6073.12,5629.62 6073.12,5719.13 6023.16,5769.09 J1.3@6023.16,5784.77
PB15: J1.4 J7.4 U8.28 | length 1859
  Top Layer w6: U8.28@5526.1,4579.68 5926.33,4579.67 v1(5979.41,4632.75) 6191.1,4632.75 J7.4@6238.17,4585.67
  Bottom Layer w6: v1(5979.41,4632.75) 5978.57,4633.58 5978.57,5336.3 6064.91,5422.64 6064.91,5575.48 6023.16,5617.24 J1.4@6023.16,5684.77
PC13: J2.2 R19.1 U8.2 | length 2906.8
  Top Layer w6: v1(4489.31,4850.51) 4544.57,4905.76 5083.44,4905.76 5131.19,4858.01 5131.19,4746 5159.73,4717.47 U8.2@5191.5,4717.48 ; R19.1@4539.37,3595.43 4541.13,3593.67 4582.49,3593.67 4610.22,3565.94 4610.22,3517.86 v1(4646.32,3481.76) 4938.24,3481.76 5023.18,3396.82 J2.2@5023.18,3386.67
  Bottom Layer w6: v1(4489.31,4850.51) 4489.31,4150.04 4627.28,4012.08 4627.28,3500.8 v1(4646.32,3481.76)
PC14: J2.3 R7.1 | length 2444
  Top Layer w6: v1(4539,4833.37) 4563.2,4857.57 v1(4964.47,4857.57) ; v1(4699.79,3501.93) 4945.26,3501.87 4999.79,3447.34 5042.17,3447.34 5071.78,3417.73 5071.78,3338.07 J2.3@5123.18,3286.67
  Bottom Layer w6: v1(4539,4833.37) 4528.34,4822.71 4528.34,4160.41 4672.64,4016.11 4672.64,3529.08 v1(4699.79,3501.93) ; v1(4964.47,4857.57) 4965.49,4858.59 R7.1@5006.57,4858.59
PC15: J2.4 R8.1 | length 2509.9
  Top Layer w6: v1(4535.82,4867.46) 4554.83,4886.47 v1(5057,4886.47) ; v1(4647.72,3520.31) 4648.94,3521.54 4955.21,3521.54 5012.98,3463.76 5057.56,3463.76 5123.18,3398.15 J2.4@5123.18,3386.67
  Bottom Layer w6: v1(4535.82,4867.46) 4510.34,4841.99 4510.34,4153.71 4647.72,4016.34 v1(4647.72,3520.31) ; v1(5057,4886.47) 5057.6,4885.87 R8.1@5057.6,4859.03
PF0: J2.5 R11.1 | length 1348.3
  Bottom Layer w6: R11.1@4945.59,4520.03 4945.59,3744.82 5064.65,3625.76 5064.65,3524.03 5171.38,3417.29 5171.38,3338.46 J2.5@5223.18,3286.67
PF1: J2.6 R12.1 | length 1253.9
  Bottom Layer w6: R12.1@5000.69,4521.51 5000.69,4489.63 4968.25,4457.19 4968.25,3756.79 5079.64,3645.4 5079.64,3542.46 5223.18,3398.92 J2.6@5223.18,3386.67
PF6: J1.11 LED2.2 U8.35 | length 1903.1
  Top Layer w6: LED2.2@4961.27,4991.03 5020.64,4991.03 5044.13,5014.52 5461.28,5014.52 5519.51,4956.29 v1(5622.7,4956.29) ; U8.35@5526.1,4717.48 5526.18,4717.56 v1(5593.09,4717.56)
  Bottom Layer w6: v1(5593.09,4717.56) 5623.16,4747.63 5623.16,4936.29 ; v1(5622.7,4956.29) 5622.7,4936.75 5623.16,4936.29 ; J1.11@5623.16,5784.77 5672.57,5735.36 5672.57,5655.68 5666.57,5649.68 5666.57,5427.62 5623.16,5384.21 5623.16,4936.29
PF7: J1.12 LED3.2 U8.36 | length 1725.6
  Top Layer w6: LED3.2@4962.42,5069.03 4998.76,5032.68 5477.04,5032.68 5529.82,4979.91 v1(5599.81,4979.91) ; U8.36@5526.1,4737.18 v1(5573.49,4737.17)
  Bottom Layer w6: v1(5573.49,4737.17) 5599.61,4763.29 5599.61,4959.91 ; v1(5599.81,4979.91) 5599.81,4960.11 5599.61,4959.91 ; J1.12@5623.16,5684.77 5623.16,5646.34 5580.71,5603.89 5580.71,5417.97 5599.61,5399.07 5599.61,4959.91
PF8: J2.1 LED4.2 U8.1 | length 3138.8
  Top Layer w6: v1(4495.01,4891.77) 4528.74,4925.5 v1(5022.72,4925.5) 5087.66,4925.5 5148.34,4864.82 5148.34,4753.12 5164.29,4737.17 U8.1@5191.5,4737.18 ; v1(4606.3,3483.96) 4627.8,3462.46 4924.82,3462.46 4960.77,3426.51 4960.77,3349.08 J2.1@5023.18,3286.67 ; LED4.2@4960.42,5153.03 4973.13,5153.03 v1(5021.67,5104.49)
  Bottom Layer w6: v1(4495.01,4891.77) 4463.34,4860.1 4463.34,4147.27 4606.16,4004.45 4606.16,3484.1 v1(4606.3,3483.96) ; v1(5021.67,5104.49) 5022.72,5103.44 v1(5022.72,4925.5)
PF11/BOOT0: CN2.4 CN7.4 J1.20 R17.1 R45.2 U8.44 | length 5763.9
  Top Layer w6: R45.2@3320.55,3909.68 3320.55,3877.71 3411,3787.26 v1(3411,3745.36) 3411,3339.13 3546.33,3203.8 3546.33,3135.28 CN7.4@3497.35,3086.3 ; v1(3866.23,4019.19) 3882.72,4035.68 4211.8,4035.68 CN2.4@4262.92,4086.8 4310.33,4086.8 4356.81,4133.28 v1(5400.28,4133.28) ; R17.1@4402.88,5191.76 5325.22,5191.76 v1(5329.22,5187.76) ; v1(5329.29,4896.73) U8.44@5329.3,4796.18 5329.29,4771.42 5398.47,4702.23 v1(5398.69,4702.23)
  Bottom Layer w6: v1(3411,3745.36) 3411.27,3745.09 3693.44,3745.09 3725.2,3776.85 3829.97,3776.85 3866.23,3813.11 v1(3866.23,4019.19) ; J1.20@5223.16,5684.77 5223.16,5620.38 5219.69,5616.91 5219.69,5428.78 5329.29,5319.19 5329.29,5187.76 v1(5329.29,4896.73) ; v1(5398.69,4702.23) 5398.69,4134.88 v1(5400.28,4133.28)
SWO: CN2.6 CN7.6 R14.2 R52.2 | length 2478
  Top Layer w6: R52.2@3173.17,4141.43 3172.35,4140.61 3172.35,4051.71 3136.41,4015.77 3136.41,3853.86 v1@3306.07,3684.19 ; v1(3305.46,3683.38) 3305.46,3683.58 v1@3306.07,3684.19 ; CN7.6@3397.35,3086.3 3347.23,3136.42 3347.23,3230.01 3307.17,3270.07 3307.17,3683.09 v1@3306.07,3684.19 ; v1(3912.83,3917.38) 3931.42,3935.97 4212.09,3935.97 CN2.6@4262.92,3986.8
  Bottom Layer w6: v1(3305.46,3683.38) 3384.45,3683.38 3396.39,3695.33 3686.07,3695.33 3743.59,3752.85 3883.87,3752.85 3912.83,3781.81 v1(3912.83,3917.38) ; CN2.6@4262.92,3986.8 4263.47,3986.26 R14.2@4398.66,3986.26
USBM: CN6.A7 CN6.B7 R38.1 TP3.2 | length 320.3
  Top Layer w6: CN6.A7@3390.37,5744.79 3390.37,5688.16 ; R38.1@3421.17,5574.75 3421.17,5607.09 v1(3397.17,5631.09) 3390.37,5637.89 3390.37,5688.16 ; CN6.B7@3429.67,5744.79 3429.67,5697.41 3420.42,5688.16 3390.37,5688.16
  Bottom Layer w6: v1(3397.17,5631.09) 3427.18,5631.09 TP3.2@3439.17,5619.1
USBP: CN6.A6 CN6.B6 R37.1 TP3.3 | length 364.9
  Top Layer w6: R37.1@3359.17,5574.75 3377.17,5592.75 v1(3377.17,5611.09) 3377.17,5688.14 3370.67,5694.64 CN6.B6@3370.67,5744.79 3371.17,5745.29 3371.17,5793.09 3381.17,5803.09 3399.17,5803.09 3409.97,5792.29 CN6.A6@3409.97,5744.79
  Bottom Layer w6: TP3.3@3339.17,5619.1 3347.18,5611.09 v1(3377.17,5611.09)
VCC: C8.2 C9.2 C10.2 C11.2 C12.2 C14.2 J9.1 P1.1 R43.1 RP1.1 RP1.2 RP1.3 RP1.4 U6.1 U6.9 U6.24 U6.36 U6.48 U7.5 | length 2731.1
  Top Layer w10: U6.24@3206.5,4416.71 3254.79,4416.71 v1(3255.17,4417.09) ; v1(3323.83,4632.89) 3324.61,4633.67 U6.9@3324.61,4692.3 ; RP1.4@3383.74,4907.85 RP1.3@3383.74,4939.34 RP1.2@3383.74,4970.84 RP1.1@3383.74,5002.33 3383.74,5041.66 3501.17,5159.09 v2(3635.17,5159.09) ; v1(3471.59,4404.04) 3482.09,4393.55 U6.36@3482.09,4357.66 ; U6.1@3482.09,4692.3 3482.09,4652.04 3481.17,4651.13 v1(3481.17,4633.09) 3502.14,4633.09 3502.29,4633.25 U6.48@3541.14,4633.25
  Top Layer w20: v2(3635.17,5159.09) 3633.34,5160.92 C14.2@3633.34,5212.88 3632.83,5213.39 R43.1@3632.83,5281.09 3632.83,5311.84 3641.17,5320.18 U7.5@3641.17,5350.09
  Bottom Layer w10: v1(3471.59,4404.04) 3424.67,4404.04 C11.2@3419.17,4409.53 C10.2@3299.17,4409.53 3262.73,4409.53 v1(3255.17,4417.09) 3255.17,4573.09 3278.73,4596.65 C12.2@3325.17,4596.65 3323.83,4598 v1(3323.83,4632.89) 3324.04,4633.09 v1(3481.17,4633.09) C9.2@3481.17,4594.65
  Bottom Layer w15: C9.2@3481.17,4594.65 C8.2@3551.17,4594.65 3597.86,4594.65 3599.17,4593.34 ; P1.1@3640.35,4244.3 3640.35,4354.27 3661,4374.92 3661,4533.27 3600.92,4593.34 3599.17,4593.34 ; J9.1@3671.35,4713.3 3609.14,4651.09 3607.17,4651.09 3599.17,4643.09 3599.17,4593.34
  Bottom Layer w20: v2(3635.17,5159.09) 3693.17,5101.09 3693.17,4735.13 J9.1@3671.35,4713.3
VCC3.5V: C17.2 D5.2 R50.1 U5.5 | length 223.8
  Top Layer w20: D5.2@3265.92,5131.09 3264.73,5132.28 C17.2@3264.73,5215.09 3266.83,5217.19 R50.1@3266.83,5283.09 3275.17,5291.43 U5.5@3275.17,5350.09
VDD: B2.3 B2.4 C5.2 C6.2 C7.2 J1.24 J2.24 JP1.1 JP3.2 L1.1 R13.1 U8.24 U8.48 | length 8732.7
  Top Layer w6: v2(4387.22,4951.76) v2@4387.46,4951.52
  Top Layer w10: C6.2@5196.04,4886.55 5250.5,4832.08 U8.48@5250.5,4796.18 5250.5,4762.48 v1@5315.02,4697.97 ; U8.24@5467.1,4461.58 5467.1,4425.39 5479.14,4413.35 5616.95,4413.35 C7.2@5617.24,4413.06
  Top Layer w12: v1(5315.02,4697.76) v1@5315.02,4697.97
  Top Layer w15: B2.3@4877.16,3417.85 4923.61,3417.85 4939.34,3402.12 4939.34,3230.8 4986.1,3184.04 6190.24,3184.04 6229.05,3222.85 6229.05,3385.56 ; C7.2@5617.24,4413.06 5617.47,4413.28 v3(5617.47,4455.53) ; v1(5800.22,3694.76) 6169.52,3694.76 6229.05,3635.23 6229.05,3385.56 ; J2.24@6123.18,3386.67 6227.94,3386.67 6229.05,3385.56
  Top Layer w20: R13.1@4119.22,4941.26 4130.72,4941.26 4141.22,4951.76 JP3.2@4229.22,4951.76 4229.46,4951.53 4387.46,4951.52 5189.58,4951.5 C5.2@5195.98,4945.1 ; JP1.1@4230.07,5090.22 4170.76,5090.22 4063.22,5197.76 4063.22,5575.76 4172.23,5684.77 J1.24@5023.16,5684.77 ; v2(4539.8,3471.47) 4539.8,3424.5 B2.4@4546.45,3417.85 B2.3@4877.16,3417.85 ; C6.2@5196.04,4888.52 C5.2@5196.04,4945.04
  Bottom Layer w12: L1.1@5315.02,4615.8 v1(5315.02,4697.76)
  Bottom Layer w15: v3(5617.47,4455.53) 5654.96,4418.04 5654.96,3840.02 v1(5800.22,3694.76)
  Bottom Layer w20: JP3.2@4229.22,4951.76 4229.22,5089.37 JP1.1@4230.07,5090.22 ; v2(4387.22,4951.76) 4387.22,4145.76 4540.04,3992.95 4540.04,3471.71 v2(4539.8,3471.47)
VDDA: C28.2 C29.2 J3.8 L1.2 U8.9 | length 1653.1
  Top Layer w10: v1(5133.22,4571.76) 5141.14,4579.68 U8.9@5191.5,4579.68
  Bottom Layer w12: J3.8@4563.17,5485.09 4563.17,5439.81 4593.22,5409.76 4809.22,5409.76 5133.22,5085.76 5133.22,4690.64 5166.38,4657.48 5254.46,4657.48 5277.01,4634.94 5277.01,4556.2 ; v1(5133.22,4571.76) 5148.78,4556.2 C29.2@5179.22,4556.2 C28.2@5235.22,4556.2 5277.01,4556.2 ; L1.2@5315.02,4554.8 5313.62,4556.2 5277.01,4556.2
pads on no net: CN6.A8 CN6.B8 J2.8 J2.9 J4.1 J4.8 U6.2 U6.3 U6.4 U6.5 U6.6 U6.14 U6.15 U6.16 U6.17 U6.18 U6.21 U6.22 U6.29 U6.38 U6.41 U6.42 U6.43 U6.45 U6.46

## Polygon pours and split planes (outlines as drawn)
GND on Top Layer (solid, remove dead copper, pour order 0): 3008.01,6097.64 7102.43,6097.64 7102.43,3000 3008.01,3000
GND on Bottom Layer (solid, remove dead copper, pour order 2): 3000,6074.49 7092.09,6074.49 7092.09,3015.23 3000,3015.23

## Keep-outs
Top Layer:
  region: 4063.22,4485.76 4113.22,4485.76 4113.22,4449.76 4063.22,4449.76
  region: 4077.22,4661.76 4107.22,4661.76 4107.22,4629.76 4077.22,4629.76
Bottom Layer:
  region: 6806.37,4061.02 6824.2,4061.02 6824.2,4024.43 6806.37,4024.43
Board Outline Layer:
  circle w1: c6613.59,5921.94 r62.99
  region: 6676.59,5921.94 cw(c6613.59,5921.94) 6550.6,5921.94 cw(c6613.59,5921.94)
  circle w1: c6613.59,3147.26 r62.99
  region: 6676.59,3147.26 cw(c6613.59,3147.26) 6550.6,3147.26 cw(c6613.59,3147.26)
  circle w1: c3926.17,3147.26 r62.99
  region: 3989.17,3147.26 cw(c3926.17,3147.26) 3863.18,3147.26 cw(c3926.17,3147.26)
  circle w1: c4172.52,3585.63 r62.99
  region: 4235.51,3585.63 cw(c4172.52,3585.63) 4109.52,3585.63 cw(c4172.52,3585.63)
  circle w1: c6222.52,4885.63 r62.99
  region: 6285.51,4885.63 cw(c6222.52,4885.63) 6159.52,4885.63 cw(c6222.52,4885.63)
  circle w1: c4222.52,5485.63 r62.99
  region: 4285.51,5485.63 cw(c4222.52,5485.63) 4159.52,5485.63 cw(c4222.52,5485.63)
  circle w1: c3926.19,5921.94 r62.99
  region: 3989.18,5921.94 cw(c3926.19,5921.94) 3863.2,5921.94 cw(c3926.19,5921.94)
  region: 6825.41,4219.6 7023.41,4219.6 7023.41,3862.6 6825.41,3862.6
  lines w7.99: 3762.92,5650.54 3762.92,5967.2 ; 3763.18,3102.8 3763.18,3552.49 ; 3763.18,3625.54 3763.18,3717.54 ; 3763.18,3828.54 3763.18,4844.54 ; 3763.18,4922.54 3763.18,5572.54 ; 3802.17,3102.75 3802.17,3552.49 ; 3802.17,3625.54 3802.17,3717.54 ; 3802.17,3828.54 3802.17,4844.54 ; 3802.17,4922.54 3802.17,5572.54 ; 3802.43,5650.54 3802.43,5975.76
  lines w8: 3684.18,6045.94 cw(c3684.18,5967.2) 3762.92,5967.2 ; 3684.57,3024.83 ccw(c3684.57,3103.57) 3763.31,3103.57 ; 3762.92,5650.54 3802.43,5650.54 ; 3763.18,3552.49 3802.17,3552.49 ; 3763.18,3625.54 3802.17,3625.54 ; 3763.18,3717.54 3802.17,3717.54 ; 3763.18,3828.54 3802.17,3828.54 ; 3763.18,4844.54 3802.17,4844.54 ; 3763.18,4922.54 3802.17,4922.54 ; 3763.18,5572.54 3802.17,5572.54 ; 3802.13,3103.69 ccw(c3881.08,3103.69) 3881.08,3024.73 ; 3802.43,5967.2 cw(c3881.17,5967.2) 3881.17,6045.94 ; 3035.22,3102.5 ccw(c3113.96,3102.5) 3113.96,3023.76 7008.01,3023.76 ccw(c7008.01,3102.5) 7086.75,3102.5 7086.75,5967.02 ccw(c7008.01,5967.02) 7008.01,6045.76 3113.96,6045.76 ccw(c3113.96,5967.02) 3035.22,5967.02 3035.22,3102.5

## Other copper
Top Layer:
  drawing of 603 lines, arcs and shapes, not listed
Bottom Layer:
  drawing of 350 lines, arcs and shapes, not listed